# Altium PCB XPIRL_0V0.PCBDOC (part 2 of 4)
Units mil, origin at the board's own origin, x right, y up, seen from the top; angles counter-clockwise.
Board outline 3497.26 x 1372.5 mil, 6 copper layers (Top Layer, Mid-Layer 1, Mid-Layer 2, Mid-Layer 3, Mid-Layer 4, Bottom Layer); 217 components, 126 nets, 782 pads, 361 vias.
Unrouted connection lines stored in the file: 96.
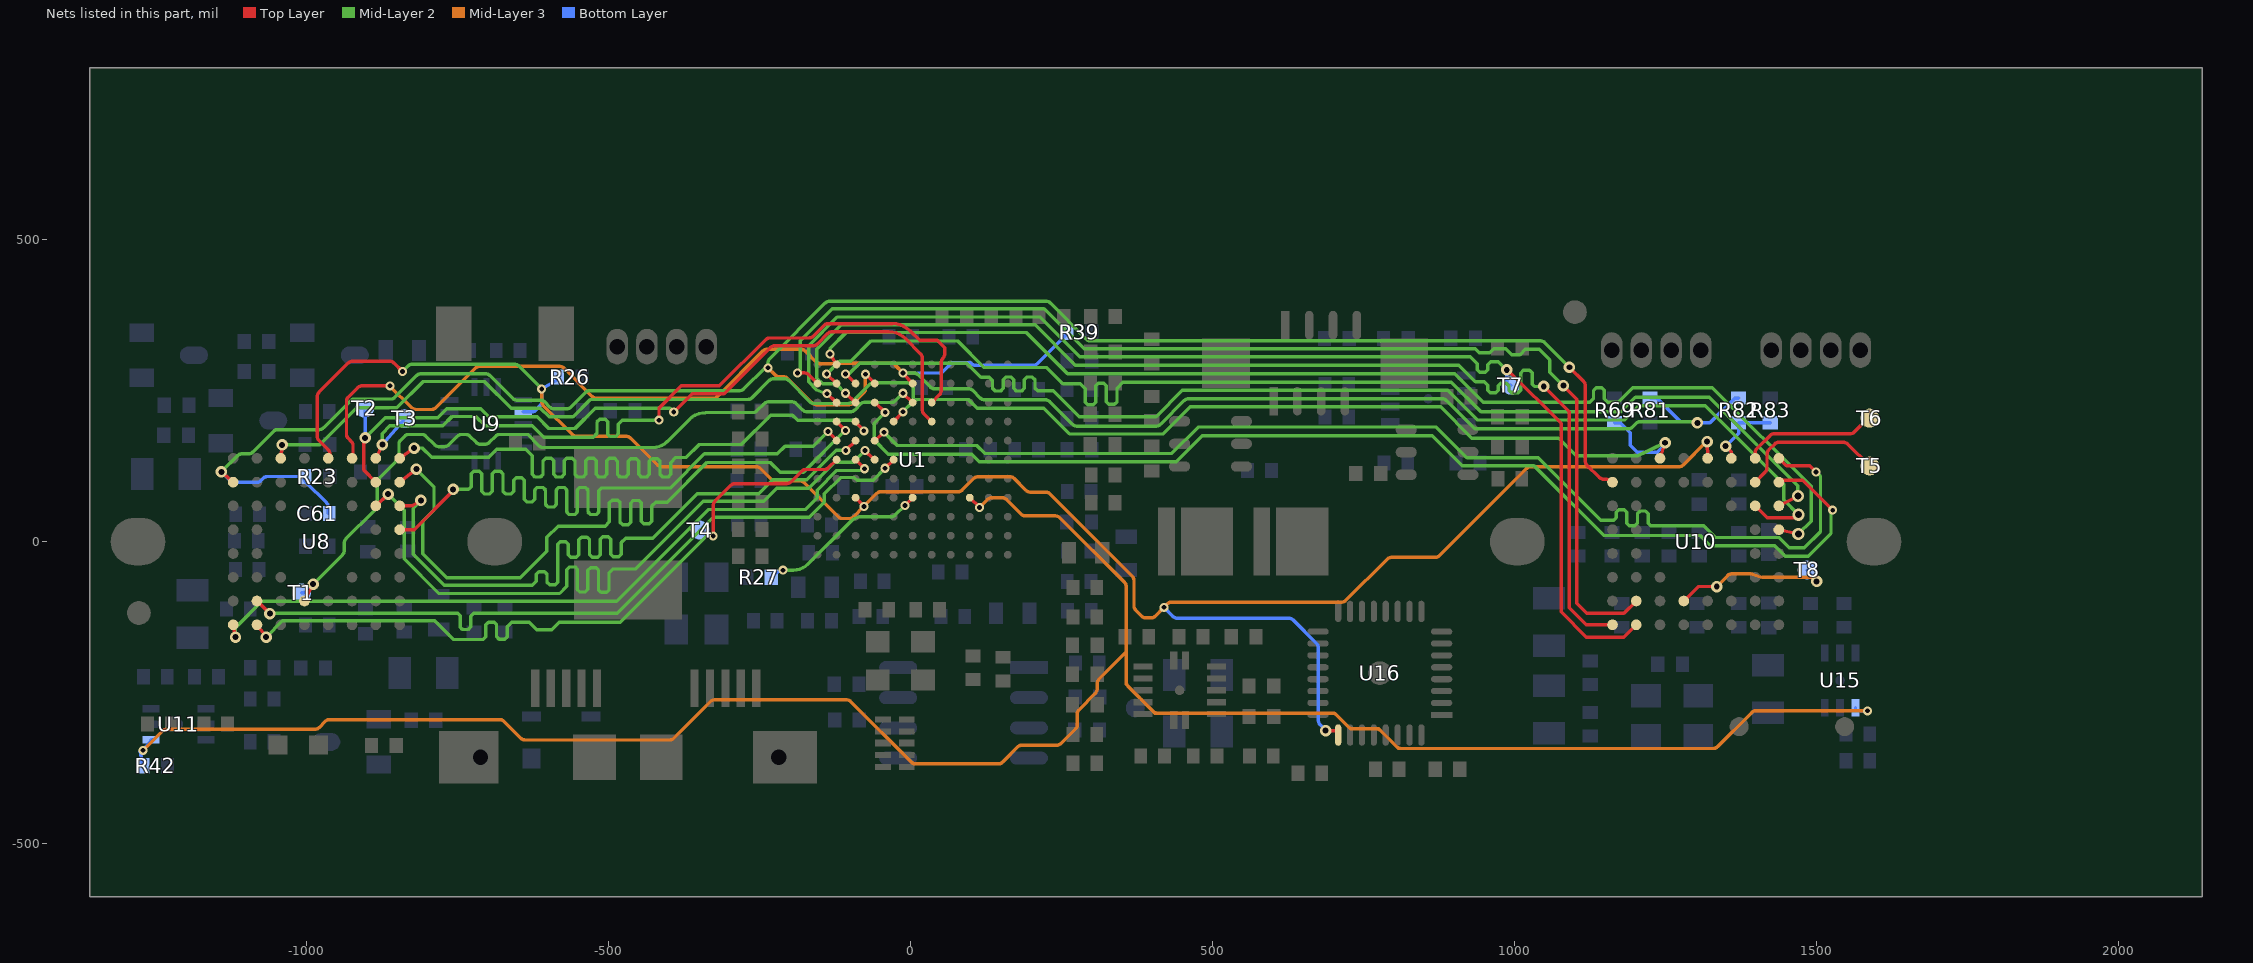
[diagram p6: the nets of this part, all layers, seen from the top]

## Via types
v1: diameter 19, hole 9.84, Top Layer to Bottom Layer, 139 vias
v2: diameter 15, hole 7.87, Top Layer to Bottom Layer, 113 vias
v3: diameter 20.47, hole 11.81, Top Layer to Bottom Layer, 58 vias
v4: diameter 23.62, hole 13.78, Top Layer to Bottom Layer, 42 vias
v5: diameter 0, hole 0, Top Layer to Bottom Layer, 9 vias

## Nets (pads, with @x,y where several pads share a name; then routed paths per layer and width w, separated by ;. In a path a pad name is that pad's centre, name@x,y a point inside that pad or via, vN(x,y) a via of type N, cw(c..) or ccw(c..) an arc to the next point about the centre after c; other vN are vias at no path point) (continued)
CAMPWR_EN: R42.1 U1.D3 U11.4 U15.4 | length 4724.7
  Top Layer w5.6: U1.D3@97.37,72.7 114.15,57.16 v2(113.62,56.6)
  Mid-Layer 3 w5.6: v2(-1271.17,-345.56) -1239.23,-313.62 ; v2(113.62,56.6) 126.58,69.55 cw(c133.51,62.62) 133.51,72.42 151.45,72.42 cw(c151.45,62.62) 158.38,69.55 182.52,45.42 ccw(c189.45,52.35) 189.45,42.55 239.4,42.55 cw(c239.4,32.75) 246.33,39.68 353.58,-67.58 cw(c346.65,-74.51) 356.45,-74.51 356.45,-163.81 356.48,-236.56 403.87,-283.95 701.35,-283.95 727.55,-310.15 770.6,-310.15 ; v2(1583.62,-280.19) 1398.82,-280.19 ; -1239.23,-313.62 cw(c-1232.3,-320.55) -1232.3,-310.75 ; -1239.23,-313.62 cw(c-1232.3,-320.55) -1232.3,-310.75 ; -1232.3,-310.75 -986.64,-310.75 ; -986.64,-310.75 ccw(c-986.64,-300.95) -979.71,-307.88 ; -986.64,-310.75 ccw(c-986.64,-300.95) -979.71,-307.88 ; -979.71,-307.88 -969.44,-297.6 ; -969.44,-297.6 cw(c-962.51,-304.53) -962.51,-294.73 ; -969.44,-297.6 cw(c-962.51,-304.53) -962.51,-294.73 ; -969.44,-297.6 cw(c-962.51,-304.53) -962.51,-294.73 ; -969.44,-297.6 cw(c-962.51,-304.53) -962.51,-294.73 ; -969.44,-297.6 cw(c-962.51,-304.53) -962.51,-294.73 ; -969.44,-297.6 cw(c-962.51,-304.53) -962.51,-294.73 ; -962.51,-294.73 -680.7,-294.73 ; -680.7,-294.73 cw(c-680.7,-304.53) -673.77,-297.6 ; -680.7,-294.73 cw(c-680.7,-304.53) -673.77,-297.6 ; -680.7,-294.73 cw(c-680.7,-304.53) -673.77,-297.6 ; -680.7,-294.73 cw(c-680.7,-304.53) -673.77,-297.6 ; -680.7,-294.73 cw(c-680.7,-304.53) -673.77,-297.6 ; -680.7,-294.73 cw(c-680.7,-304.53) -673.77,-297.6 ; -673.77,-297.6 -645.75,-325.63 ; -645.75,-325.63 ccw(c-638.82,-318.7) -638.82,-328.5 ; -645.75,-325.63 ccw(c-638.82,-318.7) -638.82,-328.5 ; -645.75,-325.63 ccw(c-638.82,-318.7) -638.82,-328.5 ; -645.75,-325.63 ccw(c-638.82,-318.7) -638.82,-328.5 ; -645.75,-325.63 ccw(c-638.82,-318.7) -638.82,-328.5 ; -645.75,-325.63 ccw(c-638.82,-318.7) -638.82,-328.5 ; -638.82,-328.5 -399.55,-328.5 ; -399.55,-328.5 ccw(c-399.55,-318.7) -392.62,-325.63 ; -399.55,-328.5 ccw(c-399.55,-318.7) -392.62,-325.63 ; -399.55,-328.5 ccw(c-399.55,-318.7) -392.62,-325.63 ; -399.55,-328.5 ccw(c-399.55,-318.7) -392.62,-325.63 ; -399.55,-328.5 ccw(c-399.55,-318.7) -392.62,-325.63 ; -399.55,-328.5 ccw(c-399.55,-318.7) -392.62,-325.63 ; -392.62,-325.63 -331.92,-264.93 ; -331.92,-264.93 cw(c-324.99,-271.86) -324.99,-262.06 ; -331.92,-264.93 cw(c-324.99,-271.86) -324.99,-262.06 ; -331.92,-264.93 cw(c-324.99,-271.86) -324.99,-262.06 ; -331.92,-264.93 cw(c-324.99,-271.86) -324.99,-262.06 ; -331.92,-264.93 cw(c-324.99,-271.86) -324.99,-262.06 ; -331.92,-264.93 cw(c-324.99,-271.86) -324.99,-262.06 ; -324.99,-262.06 -106.25,-262.06 ; -106.25,-262.06 cw(c-106.25,-271.86) -99.32,-264.93 ; -106.25,-262.06 cw(c-106.25,-271.86) -99.32,-264.93 ; -106.25,-262.06 cw(c-106.25,-271.86) -99.32,-264.93 ; -106.25,-262.06 cw(c-106.25,-271.86) -99.32,-264.93 ; -106.25,-262.06 cw(c-106.25,-271.86) -99.32,-264.93 ; -106.25,-262.06 cw(c-106.25,-271.86) -99.32,-264.93 ; -99.32,-264.93 0.95,-365.2 ; 0.95,-365.2 ccw(c7.88,-358.27) 7.88,-368.07 ; 0.95,-365.2 ccw(c7.88,-358.27) 7.88,-368.07 ; 7.88,-368.07 144.69,-368.07 ; 144.69,-368.07 ccw(c144.69,-358.27) 151.62,-365.2 ; 144.69,-368.07 ccw(c144.69,-358.27) 151.62,-365.2 ; 151.62,-365.2 176.97,-339.85 ; 176.97,-339.85 cw(c183.9,-346.78) 183.9,-336.98 ; 176.97,-339.85 cw(c183.9,-346.78) 183.9,-336.98 ; 183.9,-336.98 241.7,-336.98 ; 241.7,-336.98 ccw(c241.7,-327.18) 248.63,-334.11 ; 241.7,-336.98 ccw(c241.7,-327.18) 248.63,-334.11 ; 248.63,-334.11 272.68,-310.07 ; 272.68,-310.07 ccw(c265.75,-303.14) 275.55,-303.14 ; 272.68,-310.07 ccw(c265.75,-303.14) 275.55,-303.14 ; 275.55,-303.14 275.55,-285.06 ; 275.55,-285.06 cw(c285.35,-285.06) 278.42,-278.13 ; 275.55,-285.06 cw(c285.35,-285.06) 278.42,-278.13 ; 278.42,-278.13 305.5,-251.05 ; 305.5,-251.05 ccw(c298.57,-244.12) 308.37,-244.12 ; 305.5,-251.05 ccw(c298.57,-244.12) 308.37,-244.12 ; 308.37,-244.12 308.37,-234.91 ; 308.37,-234.91 cw(c318.17,-234.91) 311.24,-227.98 ; 308.37,-234.91 cw(c318.17,-234.91) 311.24,-227.98 ; 311.24,-227.98 356.48,-182.75 356.48,-232.5 ; 356.48,-232.5 ccw(c366.28,-232.5) 359.35,-239.43 ; 356.48,-232.5 ccw(c366.28,-232.5) 359.35,-239.43 ; 359.35,-239.43 401,-281.08 ; 401,-281.08 ccw(c407.93,-274.15) 407.93,-283.95 ; 401,-281.08 ccw(c407.93,-274.15) 407.93,-283.95 ; 407.93,-283.95 697.29,-283.95 ; 697.29,-283.95 cw(c697.29,-293.75) 704.22,-286.82 ; 697.29,-283.95 cw(c697.29,-293.75) 704.22,-286.82 ; 704.22,-286.82 724.68,-307.28 ; 724.68,-307.28 ccw(c731.61,-300.35) 731.61,-310.15 ; 724.68,-307.28 ccw(c731.61,-300.35) 731.61,-310.15 ; 731.61,-310.15 770.6,-310.15 ; 770.6,-310.15 cw(c770.6,-319.95) 777.53,-313.02 ; 770.6,-310.15 cw(c770.6,-319.95) 777.53,-313.02 ; 770.6,-310.15 774.66,-310.15 806.99,-342.48 ; 777.53,-313.02 804.12,-339.61 ; 777.53,-313.02 806.99,-342.48 ; 804.12,-339.61 ccw(c811.05,-332.68) 811.05,-342.48 ; 804.12,-339.61 ccw(c811.05,-332.68) 811.05,-342.48 ; 806.99,-342.48 811.05,-342.48 ; 811.05,-342.48 1328.41,-342.48 ; 1328.41,-342.48 ccw(c1328.41,-332.68) 1335.34,-339.61 ; 1328.41,-342.48 ccw(c1328.41,-332.68) 1335.34,-339.61 ; 1328.41,-342.48 ccw(c1328.41,-332.68) 1335.34,-339.61 ; 1328.41,-342.48 ccw(c1328.41,-332.68) 1335.34,-339.61 ; 1328.41,-342.48 ccw(c1328.41,-332.68) 1335.34,-339.61 ; 1328.41,-342.48 ccw(c1328.41,-332.68) 1335.34,-339.61 ; 1328.41,-342.48 ccw(c1328.41,-332.68) 1335.34,-339.61 ; 1328.41,-342.48 ccw(c1328.41,-332.68) 1335.34,-339.61 ; 1328.41,-342.48 ccw(c1328.41,-332.68) 1335.34,-339.61 ; 1335.34,-339.61 1391.9,-283.06 ; 1391.9,-283.06 cw(c1398.82,-289.99) 1398.82,-280.19 ; 1391.9,-283.06 cw(c1398.82,-289.99) 1398.82,-280.19 ; 1391.9,-283.06 cw(c1398.82,-289.99) 1398.82,-280.19
  Bottom Layer w5.6: R42.1@-1271.78,-371.21 -1275.84,-347.32 -1271.17,-347.32 v2(-1271.17,-345.56) -1256.27,-327.78 U11.4@-1257.87,-327.78 ; U15.4@1563.8,-275 1563.8,-280.19 v2(1583.62,-280.19)
CLK32K768: R27.1 U1.D6 | length 295.9
  Top Layer w5.6: v2(-9.97,59.68) U1.D6@2.88,72.7
  Mid-Layer 2 w5.6: v2(-211.64,-47.3) -194.43,-47.3 ccw(c-194.43,-13.53) -170.55,-37.41 -100.71,32.44 cw(c-79.41,11.14) -79.41,41.26 -32.62,41.26 ccw(c-32.62,51.06) -25.69,44.13 v2(-9.97,59.68)
  Bottom Layer w5.6: R27.1@-231.08,-59.07 -230.29,-64.94 -230.29,-60.86 cw(c-220.49,-60.86) -227.42,-53.93 v2(-211.64,-47.3)
CMOS_D0: T4.1 U1.F10 U8.A7 | length 1277.7
  Top Layer w5.6: U8.A7@-1082.68,-137.8 v1(-1067.39,-158.18) ; v2(-327.31,9.3) -327.31,59.72 ; U1.F10@-123.11,135.69 -136.68,122.12 ; -327.31,59.72 cw(c-317.51,59.72) -324.44,66.65 ; -327.31,59.72 cw(c-317.51,59.72) -324.44,66.65 ; -324.44,66.65 -297.9,93.18 ; -297.9,93.18 cw(c-290.97,86.25) -290.97,96.05 ; -297.9,93.18 cw(c-290.97,86.25) -290.97,96.05 ; -290.97,96.05 -205.42,96.05 ; -205.42,96.05 ccw(c-205.42,105.85) -198.49,98.92 ; -205.42,96.05 ccw(c-205.42,105.85) -198.49,98.92 ; -198.49,98.92 -181.04,116.38 ; -181.04,116.38 cw(c-174.11,109.45) -174.11,119.25 ; -181.04,116.38 cw(c-174.11,109.45) -174.11,119.25 ; -174.11,119.25 -143.61,119.25 ; -143.61,119.25 ccw(c-143.61,129.05) -136.68,122.12 ; -143.61,119.25 ccw(c-143.61,129.05) -136.68,122.12
  Mid-Layer 2 w5.6: v1(-1067.39,-158.18) -1040.43,-131.22 -788.55,-131.22 -757.71,-162.05 -707.85,-162.05 -703.65,-157.85 -703.65,-137.85 -699.32,-133.53 -690.12,-133.53 -686.05,-137.6 -686.05,-157.55 -681.92,-161.68 -672.72,-161.68 -668.45,-157.41 -668.45,-140.88 -661.14,-133.57 -631.62,-133.57 -619.31,-145.89 -594.38,-145.89 -582.06,-133.57 -481.22,-133.57 -338.35,9.3 v2(-327.31,9.3)
  Bottom Layer w5.6: T4.1@-349.06,19.02 -339.53,9.48 -327.49,9.48 v2(-327.31,9.3)
CMOS_D1: U1.F9 U8.A8 | length 1215.7
  Top Layer w5.6: U1.F9@-91.61,135.69 v2(-76.7,120.59)
  Top Layer w6: U8.A8@-1122.05,-137.8 v1(-1118.18,-158.3)
  Mid-Layer 2 w5.6: v1(-1118.18,-158.3) -1118.18,-142.81 -1074.4,-99.02 -487.36,-99.02 -335.29,53.05 -174.62,53.05 -155.34,72.34 -155.34,85.26 -122.86,117.73 -79.55,117.73 v2(-76.7,120.59)
CMOS_D2: U1.F7 U8.B7 | length 1223.7
  Top Layer w5.6: v2(-42.91,121.4) U1.F7@-28.62,135.69
  Top Layer w6: U8.B7@-1082.68,-98.43 -1080.25,-100.32 -1062.79,-117.79 v1(-1061.22,-119.35)
  Mid-Layer 2 w5.6: v1(-1061.22,-119.35) -1060.32,-118.44 -750.55,-118.44 -746.35,-122.64 -746.35,-141.57 -742.4,-145.52 -733.2,-145.52 -728.75,-141.07 -728.75,-123.29 -723.87,-118.4 -485.94,-118.4 -327.17,40.36 -168.58,40.36 -143.48,65.46 -143.48,78.96 -116.41,106.03 -93.54,106.03 -89.2,101.69 -62.62,101.69 v2(-42.91,121.4)
CMOS_D3: U1.G10 U8.E1 | length 1213.8
  Top Layer w5.6: U8.E1@-846.46,19.69 -822.31,19.69 -756.56,85.43 -756.56,86.42 v1(-758,86.42) ; v2(-137.11,182.33) U1.G10@-123.11,167.19
  Mid-Layer 2 w5.6: v1(-758,86.42) -732.38,86.42 -728.18,90.62 -728.18,112.67 -724.1,116.75 -714.9,116.75 -710.58,112.43 -710.58,83.02 -706.38,78.82 -697.18,78.82 -692.98,83.02 -692.98,112.19 -688.67,116.5 -679.47,116.5 -675.38,112.4 -675.38,83.02 -671.18,78.82 -661.98,78.82 -657.78,83.02 -657.78,101.78 -653.76,105.8 -644.56,105.8 -640.18,101.41 -640.18,69.81 -635.98,65.61 -626.78,65.61 -622.58,69.81 -622.58,85.42 -618.38,89.62 -609.18,89.62 -604.98,85.42 -604.98,61.41 -600.78,57.21 -591.58,57.21 -587.38,61.41 -587.38,85.42 -583.18,89.62 -573.98,89.62 -569.78,85.42 -569.78,49.01 -565.58,44.81 -556.38,44.81 -552.18,49.01 -552.18,85.42 -547.98,89.62 -538.78,89.62 -534.58,85.42 -534.58,49.01 -530.38,44.81 -521.18,44.81 -516.98,49.01 -516.98,84.45 -512.78,88.65 -398.6,88.65 -341.83,145.43 -221.01,145.43 -208.45,157.99 -161.46,157.99 v2(-137.11,182.33)
CMOS_D4: U1.G9 U8.F1 | length 1210.8
  Top Layer w5.6: U8.F1@-846.46,59.06 -825.97,59.06 v1(-811.22,68.14) ; v2(-107.74,150.98) U1.G9@-91.61,167.19
  Mid-Layer 2 w5.6: v1(-811.22,68.14) -824.16,55.2 -824.16,-21.19 -772.76,-72.59 -627.06,-72.59 -620.07,-65.59 -620.07,-54.31 -615.78,-50.03 -606.58,-50.03 -602.47,-54.14 -602.47,-67.39 -598.3,-71.57 -589.1,-71.57 -584.87,-67.34 -584.87,-4.51 -580.52,-0.16 -571.32,-0.16 -567.27,-4.22 -567.27,-21.5 -563.07,-25.7 -553.87,-25.7 -549.67,-21.5 -549.67,3.13 -545.37,7.43 -536.17,7.43 -532.07,3.33 -532.07,-21.5 -527.87,-25.7 -518.67,-25.7 -514.47,-21.5 -514.47,3.93 -510.4,8 -501.2,8 -496.87,3.66 -496.87,-21.05 -492.64,-25.28 -483.44,-25.28 -479.27,-21.1 -479.27,-1.5 -472.03,5.74 -427.08,5.74 -353.47,79.34 -251.69,79.34 -228.86,102.17 -172.49,102.17 -123.68,150.98 v2(-107.74,150.98)
CMOS_D5: U1.F8 U8.F2 | length 1211.4
  Top Layer w5.6: v2(-76.04,150.65) -60.6,135.21 U1.F8@-60.11,135.69
  Top Layer w6: U8.F2@-885.83,59.06 v1(-865.49,78.51)
  Mid-Layer 2 w5.5: v1(-865.49,78.51) -838.83,51.85 -838.83,-28.77 -781.65,-85.94 -581.72,-85.94 -569.77,-73.99 -569.77,-46.61 -565.16,-42.01 -555.91,-42.01 -552.27,-45.65 -552.27,-79.4 -548.2,-83.46 -538.95,-83.46 -534.77,-79.27 -534.77,-47.41 -530.44,-43.08 -521.19,-43.08 -517.27,-47 -517.27,-79.67 -513.21,-83.73 -503.96,-83.73 -499.77,-79.54 -499.77,-51.62 -493.65,-45.51 -456.3,-45.51 -344.18,66.61 -243.88,66.61 -222.2,88.29 -169.14,88.29 -126.02,131.41 -95.28,131.41 v2(-76.04,150.65)
CMOS_D6: U1.H10 U8.G1 | length 1215.7
  Top Layer w5.6: U8.G1@-846.46,98.43 v1(-818.75,119.89) ; U1.H10@-123.11,198.68 -108.59,184.17 -108.59,184.87 v2(-108.47,184.03)
  Mid-Layer 2 w5.6: v1(-818.75,119.89) -789.65,90.78 -789.65,52.25 -808.19,33.71 -808.19,-19.86 -768.22,-59.82 -646.58,-59.82 -602.77,-16.01 -602.77,7.13 -584.2,25.69 -506.24,25.69 -499.25,32.69 -499.25,63.99 -494.61,68.62 -485.41,68.62 -481.65,64.86 -481.65,31.83 -477.45,27.63 -468.25,27.63 -464.05,31.83 -464.05,63.66 -459.62,68.09 -450.42,68.09 -446.45,64.11 -446.45,33.75 -442.19,29.5 -432.99,29.5 -428.85,33.64 -428.85,58.91 -422.63,65.13 -403.44,65.13 -337.63,130.94 -232.95,130.94 -216.7,114.69 -177.81,114.69 v2(-108.47,184.03)
CMOS_D7: U1.H9 U8.H1 | length 1218.5
  Top Layer w5.6: U8.H1@-846.46,137.8 v1(-822.45,154.91) ; U1.H9@-91.61,198.68 v2(-77.92,183.34)
  Mid-Layer 2 w5.6: v1(-822.45,154.91) -809.02,154.91 -793.63,139.52 -698.69,139.52 -685.37,152.84 -637.43,152.84 -626.62,142.03 -626.62,111.11 -622.42,106.91 -613.22,106.91 -609.02,111.11 -609.02,133.61 -604.72,137.91 -595.51,137.91 -591.42,133.81 -591.42,111.11 -587.22,106.91 -578.02,106.91 -573.82,111.11 -573.82,133.75 -569.66,137.91 -560.46,137.91 -556.22,133.66 -556.22,111.11 -552.02,106.91 -542.82,106.91 -538.62,111.11 -538.62,133.9 -534.36,138.15 -525.16,138.15 -521.02,134.01 -521.02,111.11 -516.82,106.91 -507.62,106.91 -503.42,111.11 -503.42,133.54 -499.3,137.66 -490.1,137.66 -485.82,133.37 -485.82,111.11 -481.62,106.91 -472.42,106.91 -468.22,111.11 -468.22,133.19 -464,137.41 -454.8,137.41 -450.62,133.22 -450.62,111.11 -446.42,106.91 -437.22,106.91 -433.02,111.11 -433.02,132.84 -428.7,137.16 -419.5,137.16 -415.42,133.08 -415.42,111.11 -411.22,106.91 -402.02,106.91 -397.82,111.11 -397.82,130.57 -389.14,139.25 -371.72,139.25 -350.23,160.74 -280.77,160.74 -232.24,209.27 -196.05,209.27 -187.65,200.87 -95.44,200.87 v2(-77.92,183.34)
CMOS_D8: T7.1 U1.J10 U10.A7 | length 1975.4
  Top Layer w5.6: v2(-139.14,244.94) U1.J10@-123.11,230.18 ; v1(986.43,284.2) 988.13,282.04 989.88,282.04 1076.36,195.55 1076.36,-116.41 1118.12,-158.17 1180.41,-158.17 U10.A7@1200.79,-137.8
  Mid-Layer 2 w5.6: v2(-139.14,244.94) -139.48,244.13 -155.76,250.9 -169.18,264.32 -169.18,324.31 -121.61,371.88 213.6,371.88 279.69,305.79 621.99,305.79 622.03,305.83 925.76,305.83 937.28,294.31 937.28,284.44 941.48,280.24 950.68,280.24 954.88,284.44 954.88,292.57 960.07,297.75 972.42,297.75 986.2,283.97 v1(986.43,284.2)
  Bottom Layer w5.6: v1(986.43,284.2) 986.43,263.04 991.49,257.97 T7.1@993.14,259.01
CMOS_D9: U1.J9 U10.A8 | length 1943.2
  Top Layer w5.6: v2(-108.36,245.61) U1.J9@-91.61,230.18 ; v1(1047.64,256.82) 1089.76,214.7 1089.76,-109.63 1117.93,-137.8 U10.A8@1161.42,-137.8
  Mid-Layer 2 w5.6: v2(-108.36,245.61) -123.92,261.18 -146.25,261.18 -155.76,270.69 -155.76,318.48 -115.53,358.71 205.81,358.71 272.34,292.19 906.8,292.19 934.62,264.36 949.51,264.36 954.86,259.01 954.86,250.55 959.06,246.35 968.26,246.35 972.46,250.55 972.46,257.96 976.66,262.16 985.86,262.16 990.06,257.96 990.06,250.55 994.26,246.35 1005.44,246.35 1009.41,250.32 1009.41,279.06 1014.01,283.66 1024.06,283.66 1028.38,279.34 1028.38,260.73 1032.29,256.82 v1(1047.64,256.82)
CMOS_D10: U1.K11 U10.B7 | length 1941.1
  Top Layer w5.6: v2(-187.76,279.23) -176.22,279.23 cw(c-176.22,269.43) -169.29,276.36 U1.K11@-154.6,261.67 ; v1(1080.03,258.21) 1102.3,235.93 1102.3,-102.42 1118.54,-118.67 1180.55,-118.67 U10.B7@1200.79,-98.43
  Mid-Layer 2 w5.6: v2(-187.76,279.23) -187.97,279.43 -183.32,284.08 -183.32,332.42 -130.38,385.36 220.41,385.36 286.63,319.14 934.58,319.19 941.19,312.57 958.41,312.57 965.02,319.19 984.95,319.19 994.54,309.6 1008.44,309.6 1016.98,318.13 1040.41,318.13 1057.88,300.66 1057.88,280.35 v1(1080.03,258.21)
CMOS_D11: U1.L10 U10.E1 | length 1945.9
  Top Layer w5.5: U10.E1@1437.01,19.69 v3(1469.27,12.62)
  Top Layer w5.6: v2(-133.79,310.6) U1.L10@-123.11,293.17
  Mid-Layer 2 w5.6: v2(-133.79,310.6) -133.79,319.85 -107.49,346.15 191.15,346.15 259.21,278.09 900.57,278.09 947.82,230.84 1123.76,230.84 1130.1,237.19 1130.1,250.2 1134.33,254.43 1143.53,254.43 1147.7,250.26 1147.7,236.52 1153.27,230.95 1171.11,230.95 1194.99,254.83 1326.99,254.83 1490.45,91.37 1490.45,33.8 v3(1469.27,12.62)
CMOS_D12: U1.K10 U10.F1 | length 1944.7
  Top Layer w5.6: v2(-139.53,277.42) -139.75,277.18 U1.K10@-123.11,261.67 ; U10.F1@1437.01,59.06 v3(1468.49,75.43)
  Mid-Layer 2 w5.6: v2(-139.53,277.42) -118.3,298.64 -99.57,298.64 -66.15,332.07 77.29,332.07 121.22,288.14 224.78,288.14 251.72,261.2 280.59,261.2 288.43,253.36 288.43,230.49 292.63,226.29 301.83,226.29 306.03,230.49 306.03,258.15 310.23,262.35 319.43,262.35 323.63,258.15 323.63,231.26 327.83,227.06 337.03,227.06 341.23,231.26 341.23,254.24 351,264 894.75,264 943.78,214.97 1175.21,214.97 1199.5,239.25 1321.37,239.25 1468.49,92.13 v3(1468.49,75.43)
CMOS_D13: U1.K9 U10.F2 | length 1945.6
  Top Layer w5.6: v2(-108.33,277.42) -107.73,278.01 U1.K9@-91.61,261.67 ; U10.F2@1397.64,59.06 1417.31,39.38 1464.12,39.38 v3(1469.4,44.67)
  Mid-Layer 2 w5.6: v2(-108.33,277.42) -102.59,277.42 -84.73,295.27 92.59,295.27 115.96,271.91 129.57,271.91 135.03,266.44 135.03,253.5 139.23,249.3 148.43,249.3 152.63,253.5 152.63,268.22 156.83,272.42 166.03,272.42 170.23,268.22 170.23,253.5 174.43,249.3 183.63,249.3 187.83,253.5 187.83,268.22 192.03,272.42 201.23,272.42 205.43,268.22 205.43,254.09 209.63,249.89 235.58,249.89 278.68,206.79 405.81,206.79 449.49,250.47 888.95,250.47 938.18,201.24 1181.2,201.24 1204.83,224.87 1314.8,224.87 1444.73,94.94 1444.73,69.35 v3(1469.4,44.67)
CMOS_D14: U1.J8 U10.G1 | length 1943.4
  Top Layer w5.6: U1.J8@-60.11,230.18 v2(-42.67,214.03) ; U10.G1@1437.01,98.43 1439.52,101.69 1476.29,101.69 v2(1526.04,51.94)
  Mid-Layer 2 w5.6: v2(-42.67,214.03) -61,195.7 -61,168.19 -37.57,144.76 101.03,144.76 113.4,132.39 439.62,132.39 482.5,175.27 863.37,175.27 913,125.64 1031.52,125.64 1147.04,10.12 1306.33,10.12 1323.28,-6.83 1430.02,-6.83 1447.71,-24.53 1485.32,-24.53 1523.16,13.32 1523.16,49.07 v2(1526.04,51.94)
CMOS_D15: U1.G8 U10.H1 | length 1939.9
  Top Layer w5.6: U1.G8@-60.11,167.19 v2(-44.56,181.17) ; U10.H1@1437.01,137.8 1449.49,125.31 1488.41,125.31 v2(1498.4,115.32)
  Mid-Layer 2 w5.6: v2(-44.56,181.17) -22.43,159.04 109.35,159.04 122.48,145.91 431.75,145.91 475.48,189.65 869.78,189.65 920.56,138.87 1038.39,138.87 1141.68,35.58 1163.4,35.58 1167.6,39.78 1167.6,48.51 1171.8,52.71 1181,52.71 1185.2,48.51 1185.2,30.12 1189.4,25.92 1198.6,25.92 1202.8,30.12 1202.8,46.35 1207,50.55 1216.2,50.55 1220.4,46.34 1220.4,30.12 1224.6,25.92 1312.38,25.92 1331.47,6.84 1436.83,6.84 1453.88,-10.21 1478.99,-10.21 1505.91,16.7 1505.91,107.81 v2(1498.4,115.32)
CMOS_HD: T3.1 U1.J5 U8.H2 | length 1393.6
  Top Layer w5.6: U8.H2@-885.83,137.8 v1(-875.13,160.6) ; v2(-417.04,201) -417.04,220.71 -379.98,257.77 -316.99,257.77 -240.55,334.21 ; U1.J5@34.37,230.18 47.25,243.06 ; -240.55,334.21 cw(c-233.62,327.28) -233.62,337.08 ; -240.55,334.21 cw(c-233.62,327.28) -233.62,337.08 ; -233.62,337.08 -168.79,337.08 ; -168.79,337.08 ccw(c-168.79,346.88) -161.86,339.95 ; -168.79,337.08 ccw(c-168.79,346.88) -161.86,339.95 ; -161.86,339.95 -143.73,358.08 ; -143.73,358.08 cw(c-136.8,351.15) -136.8,360.95 ; -143.73,358.08 cw(c-136.8,351.15) -136.8,360.95 ; -136.8,360.95 -30.76,360.95 ; -30.76,360.95 cw(c-30.76,319.61) -1.53,348.84 ; -30.76,360.95 cw(c-30.76,319.61) -1.53,348.84 ; -1.53,348.84 14.28,333.03 43.5,333.03 55.92,320.61 55.92,310.44 ; 47.25,243.06 ccw(c40.32,249.99) 50.12,249.99 ; 47.25,243.06 ccw(c40.32,249.99) 50.12,249.99 ; 50.12,249.99 50.12,296.52 ; 50.12,296.52 cw(c59.92,296.52) 52.99,303.45 ; 50.12,296.52 cw(c59.92,296.52) 52.99,303.45 ; 52.99,303.45 53.05,303.51 ; 53.05,303.51 ccw(c46.12,310.44) 55.92,310.44 ; 53.05,303.51 ccw(c46.12,310.44) 55.92,310.44
  Mid-Layer 2 w5.6: v1(-875.13,160.6) -875.13,178.9 -862.56,191.47 -775.37,191.47 -759.78,207.06 -720.31,207.06 -704.88,191.63 -626.86,191.63 -607.98,172.74 -525.9,172.74 -519.71,178.93 -519.71,198.05 -515.41,202.35 -506.21,202.35 -502.11,198.24 -502.11,177.79 -498.22,173.9 -489.02,173.9 -484.51,178.41 -484.51,194.46 -477.98,201 v2(-417.04,201)
  Bottom Layer w5.6: v1(-875.13,160.6) T3.1@-837.71,203.79
CMOS_HD_R: T6.1 U10.H2 | length 223.6
  Top Layer w5.6: U10.H2@1397.64,137.8 1397.64,146.94 cw(c1407.44,146.94) 1400.51,153.87 1422.31,175.66 cw(c1429.24,168.73) 1429.24,178.53 1554.83,178.53 ccw(c1554.83,188.33) 1561.76,181.4 1584.8,204.45 T6.1@1587.13,204.45
CMOS_OE: R69.2 U1.H7 U8.H6 U10.H6 | length 2772.3
  Top Layer w5.6: U1.H7@-28.62,198.68 v2(-13.18,214.84) ; U10.H6@1240.16,137.8 v1(1248.54,163.66)
  Top Layer w6: U8.H6@-1043.31,137.8 v1(-1040.87,160.1)
  Mid-Layer 2 w5.6: v1(-1040.87,160.1) -978.52,160.1 -917.29,221.33 -850.85,221.33 -807.16,265.03 -706.04,265.03 -661.89,220.88 -613.57,220.88 -599.1,206.41 -559.36,206.41 -530.54,235.23 -270.02,235.23 ccw(c-270.02,245.03) -263.09,238.1 -234.4,266.8 cw(c-227.47,259.87) -227.47,269.67 -209.45,269.67 cw(c-209.45,259.87) -202.52,266.8 -167.3,231.57 ccw(c-160.37,238.5) -160.37,228.7 -103.93,228.7 ccw(c-103.93,238.5) -97,231.57 -68.71,259.87 cw(c-61.78,252.94) -61.78,262.74 -27.58,262.74 -27.52,262.8 -6.51,262.8 cw(c-6.51,253) 0.42,259.93 1.16,259.19 cw(c-5.77,252.26) 4.03,252.26 4.03,232.05 v2(-13.18,214.84) 4.34,232.36 ; v1(1248.54,163.66) 1203.19,142.14 1101.8,142.14 1072.58,171.36 928.51,171.36 876.92,222.96 462.33,222.96 417.54,178.17 262.45,178.17 220.16,220.45 109.97,220.45 95.19,235.23 11.27,235.23 ; 4.34,232.36 cw(c11.27,225.43) 11.27,235.23 ; 4.34,232.36 cw(c11.27,225.43) 11.27,235.23
  Bottom Layer w5.6: R69.2@1164.93,196.86 1174.66,196.86 1191,180.53 1191,159.22 1202.31,147.92 1235.6,147.92 1248.54,160.86 v1(1248.54,163.66)
CMOS_PCLK: T1.1 U1.J6 U8.B5 | length 1546
  Top Layer w5.6: U8.B5@-1003.94,-98.43 v1(-989.76,-70.35) ; v2(-13.14,245.57) U1.J6@2.88,230.18
  Mid-Layer 2 w5.5: v1(-989.76,-70.35) -941,-21.58 ; -427.33,155.72 -608.95,155.72 ; v2(-13.14,245.57) -25.63,233.13 ; -941,-21.58 ccw(c-947.8,-14.78) -938.18,-14.78 ; -941,-21.58 ccw(c-947.8,-14.78) -938.18,-14.78 ; -938.18,-14.78 -938.18,-2.43 ; -938.18,-2.43 cw(c-928.55,-2.43) -935.36,4.37 ; -938.18,-2.43 cw(c-928.55,-2.43) -935.36,4.37 ; -935.36,4.37 -889.43,50.31 ; -889.43,50.31 ccw(c-903.33,64.21) -883.67,64.21 ; -889.43,50.31 ccw(c-903.33,64.21) -883.67,64.21 ; -883.67,64.21 -883.67,91.63 ; -883.67,91.63 cw(c-859.77,91.63) -876.67,108.53 ; -883.67,91.63 cw(c-859.77,91.63) -876.67,108.53 ; -876.67,108.53 -853.64,131.56 ; -853.64,131.56 ccw(c-868.16,146.08) -847.63,146.08 ; -853.64,131.56 ccw(c-868.16,146.08) -847.63,146.08 ; -847.63,146.08 -847.63,161.3 ; -847.63,161.3 cw(c-838,161.3) -844.81,168.11 ; -847.63,161.3 cw(c-838,161.3) -844.81,168.11 ; -844.81,168.11 -838.37,174.54 ; -838.37,174.54 cw(c-831.57,167.74) -831.57,177.36 ; -838.37,174.54 cw(c-831.57,167.74) -831.57,177.36 ; -831.57,177.36 -809.67,177.36 ; -809.67,177.36 cw(c-809.67,167.74) -802.86,174.54 ; -809.67,177.36 cw(c-809.67,167.74) -802.86,174.54 ; -802.86,174.54 -788.3,159.98 ; -788.3,159.98 ccw(c-781.49,166.78) -781.49,157.16 ; -788.3,159.98 ccw(c-781.49,166.78) -781.49,157.16 ; -781.49,157.16 -772.1,157.16 ; -772.1,157.16 ccw(c-772.1,166.78) -765.3,159.98 ; -772.1,157.16 ccw(c-772.1,166.78) -765.3,159.98 ; -765.3,159.98 -750.73,174.54 ; -750.73,174.54 cw(c-743.92,167.74) -743.93,177.36 ; -750.73,174.54 cw(c-743.92,167.74) -743.93,177.36 ; -743.92,177.36 -737.1,177.36 ; -737.1,177.36 cw(c-737.1,167.74) -730.29,174.54 ; -737.1,177.36 cw(c-737.1,167.74) -730.29,174.54 ; -730.29,174.54 -719.83,164.08 ; -719.83,164.08 ccw(c-713.02,170.88) -713.02,161.26 ; -719.83,164.08 ccw(c-713.02,170.88) -713.02,161.26 ; -713.02,161.26 -704.84,161.26 ; -704.84,161.26 ccw(c-704.84,170.88) -698.03,164.08 ; -704.84,161.26 ccw(c-704.84,170.88) -698.03,164.08 ; -698.03,164.08 -687.57,174.54 ; -687.57,174.54 cw(c-680.76,167.74) -680.76,177.36 ; -687.57,174.54 cw(c-680.76,167.74) -680.76,177.36 ; -680.76,177.36 -634.58,177.36 -615.75,158.54 ; -615.75,158.54 ccw(c-608.95,165.34) -608.95,155.72 ; -615.75,158.54 ccw(c-608.95,165.34) -608.95,155.72 ; -403.26,165.66 cw(c-427.31,189.71) -427.31,155.7 ccw(c-427.31,189.71) -403.26,165.66 ; -403.26,165.66 -366.54,202.38 ; -366.54,202.38 cw(c-340.11,175.95) -340.11,213.33 ; -366.54,202.38 cw(c-340.11,175.95) -340.11,213.33 ; -340.11,213.33 -261.67,213.57 ; -261.67,213.57 ccw(c-261.67,223.19) -254.86,216.39 ; -261.67,213.57 ccw(c-261.67,223.19) -254.86,216.39 ; -254.86,216.39 -242.8,228.45 ; -242.8,228.45 cw(c-236,221.64) -236,231.27 ; -242.8,228.45 cw(c-236,221.64) -236,231.27 ; -236,231.27 -196.58,231.27 ; -196.58,231.27 cw(c-196.58,221.64) -189.77,228.45 ; -196.58,231.27 cw(c-196.58,221.64) -189.77,228.45 ; -189.77,228.45 -179.12,217.8 ; -179.12,217.8 ccw(c-172.31,224.6) -172.31,214.98 ; -179.12,217.8 ccw(c-172.31,224.6) -172.31,214.98 ; -172.31,214.98 -100.09,214.98 ; -100.09,214.98 ccw(c-100.09,224.6) -93.28,217.8 ; -100.09,214.98 ccw(c-100.09,224.6) -93.28,217.8 ; -93.28,217.8 -83.03,228.05 ; -83.03,228.05 cw(c-76.23,221.24) -76.23,230.87 ; -83.03,228.05 cw(c-76.23,221.24) -76.23,230.87 ; -76.23,230.87 -56.28,230.87 -55.73,230.32 -32.44,230.32 ; -32.44,230.32 ccw(c-32.44,239.94) -25.63,233.13 ; -32.44,230.32 ccw(c-32.44,239.94) -25.63,233.13
  Bottom Layer w5.6: T1.1@-1008.93,-84.89 -1008.36,-84.89 ccw(c-1008.36,-75.09) -1001.43,-82.02 v1(-989.76,-70.35)
CMOS_PCLK_R: T8.1 U10.B5 | length 266.3
  Top Layer w5.6: U10.B5@1279.53,-98.43 1303.52,-74.43 v1(1334.07,-74.43)
  Mid-Layer 3 w5.6: v1(1334.07,-74.43) 1352.24,-56.26 cw(c1359.17,-63.19) 1359.17,-53.39 1390.16,-53.39 1408.99,-59.25 1492.67,-59.25 v1(1499.32,-65.89)
  Bottom Layer w5.6: T8.1@1483.52,-46.98 v1(1499.32,-65.89)
CMOS_RST: C61.2 R23.1 U1.K8 U8.G8 U10.G8 | length 3411.7
  Top Layer w5.6: v2(-75.37,276.99) -75.39,278.35 U1.K8@-60.11,261.67 ; v1(1090.07,288.65) 1113.49,265.23 ; U10.G8@1161.42,98.43 U10.G8@1157.55,100.43 ; 1113.49,265.23 cw(c1106.56,258.31) 1116.36,258.31 ; 1113.49,265.23 cw(c1106.56,258.31) 1116.36,258.31 ; 1113.49,265.23 cw(c1106.56,258.31) 1116.36,258.31 ; 1116.36,133.61 ccw(c1126.16,133.61) 1119.23,126.68 ; 1116.36,133.61 ccw(c1126.16,133.61) 1119.23,126.68 ; 1116.36,133.61 ccw(c1126.16,133.61) 1119.23,126.68 ; 1116.36,133.61 1116.36,258.31 ; 1119.23,126.68 1139.75,106.17 ; 1139.75,106.17 ccw(c1146.68,113.1) 1146.68,103.3 ; 1139.75,106.17 ccw(c1146.68,113.1) 1146.68,103.3 ; 1139.75,106.17 ccw(c1146.68,113.1) 1146.68,103.3 ; 1146.68,103.3 1150.62,103.3 ; 1150.62,103.3 cw(c1150.62,93.5) U10.G8@1157.55,100.43 ; 1150.62,103.3 cw(c1150.62,93.5) U10.G8@1157.55,100.43 ; 1150.62,103.3 cw(c1150.62,93.5) U10.G8@1157.55,100.43
  Top Layer w6: v1(-1141.61,115.28) U8.G8@-1122.05,98.43
  Mid-Layer 2 w5.5: -623.97,234.24 -613.25,234.24 ; v2@-237.57,287.67 -241.55,287.67 -276.45,252.78 ; -613.25,234.24 cw(c-613.25,224.62) -606.45,231.42 ; -613.25,234.24 cw(c-613.25,224.62) -606.45,231.42 ; -606.45,231.42 -597.58,222.55 ; -597.58,222.55 ccw(c-590.77,229.36) -590.77,219.73 ; -597.58,222.55 ccw(c-590.77,229.36) -590.77,219.73 ; -590.77,219.73 -569.88,219.73 ; -569.88,219.73 ccw(c-569.88,229.36) -563.08,222.55 ; -569.88,219.73 ccw(c-569.88,229.36) -563.08,222.55 ; -563.08,222.55 -538.49,247.14 ; -538.49,247.14 cw(c-531.68,240.34) -531.68,249.96 ; -538.49,247.14 cw(c-531.68,240.34) -531.68,249.96 ; -531.68,249.96 -283.25,249.96 ; -283.25,249.96 ccw(c-283.25,259.59) -276.45,252.78 ; -283.25,249.96 ccw(c-283.25,259.59) -276.45,252.78
  Mid-Layer 2 w5.6: v1(-1141.61,115.28) -1114.39,142.51 ; -623.97,234.24 -652.39,234.24 ; v2@-237.57,287.67 v2(-236.76,287.67) -236.76,295.66 ; v1(1090.07,288.65) 1049.36,329.36 ; -1114.39,142.51 cw(c-1107.46,135.58) -1107.46,145.38 ; -1114.39,142.51 cw(c-1107.46,135.58) -1107.46,145.38 ; -1107.46,145.38 -1096.43,145.38 ; -1096.43,145.38 ccw(c-1096.43,155.18) -1089.5,148.25 ; -1096.43,145.38 ccw(c-1096.43,155.18) -1089.5,148.25 ; -1089.5,148.25 -1055.16,182.58 ; -1055.16,182.58 cw(c-1048.23,175.65) -1048.23,185.45 ; -1055.16,182.58 cw(c-1048.23,175.65) -1048.23,185.45 ; -1048.23,185.45 -979.38,185.45 ; -979.38,185.45 ccw(c-979.38,195.25) -972.45,188.32 ; -979.38,185.45 ccw(c-979.38,195.25) -972.45,188.32 ; -972.45,188.32 -927.66,233.11 ; -927.66,233.11 cw(c-920.73,226.18) -920.73,235.98 ; -927.66,233.11 cw(c-920.73,226.18) -920.73,235.98 ; -920.73,235.98 -861.1,235.98 ; -861.1,235.98 ccw(c-861.1,245.78) -854.17,238.85 ; -861.1,235.98 ccw(c-861.1,245.78) -854.17,238.85 ; -854.17,238.85 -817.91,275.12 ; -817.91,275.12 cw(c-810.98,268.19) -810.98,277.99 ; -817.91,275.12 cw(c-810.98,268.19) -810.98,277.99 ; -810.98,277.99 -704.25,277.99 ; -704.25,277.99 cw(c-704.25,268.19) -697.32,275.12 ; -704.25,277.99 cw(c-704.25,268.19) -697.32,275.12 ; -697.32,275.12 -659.32,237.11 ; -659.32,237.11 ccw(c-652.39,244.04) -652.39,234.24 ; -659.32,237.11 ccw(c-652.39,244.04) -652.39,234.24 ; -236.76,295.66 cw(c-226.96,295.66) -233.89,302.59 ; -236.76,295.66 cw(c-226.96,295.66) -233.89,302.59 ; -236.76,295.66 cw(c-226.96,295.66) -233.89,302.59 ; -233.89,302.59 -141.45,395.04 ; -141.45,395.04 cw(c-134.52,388.11) -134.52,397.91 ; -141.45,395.04 cw(c-134.52,388.11) -134.52,397.91 ; -141.45,395.04 cw(c-134.52,388.11) -134.52,397.91 ; -134.52,397.91 223.76,397.91 ; 223.76,397.91 cw(c223.76,388.11) 230.69,395.04 ; 223.76,397.91 cw(c223.76,388.11) 230.69,395.04 ; 223.76,397.91 cw(c223.76,388.11) 230.69,395.04 ; 230.69,395.04 290.63,335.1 ; 290.63,335.1 ccw(c297.55,342.03) 297.55,332.23 ; 290.63,335.1 ccw(c297.55,342.03) 297.55,332.23 ; 290.63,335.1 ccw(c297.55,342.03) 297.55,332.23 ; 297.55,332.23 1042.43,332.23 ; 1042.43,332.23 cw(c1042.43,322.43) 1049.36,329.36 ; 1042.43,332.23 cw(c1042.43,322.43) 1049.36,329.36 ; 1042.43,332.23 cw(c1042.43,322.43) 1049.36,329.36
  Mid-Layer 3 w5.6: v2(-236.76,287.67) -225.01,275.92 ccw(c-218.08,282.85) -218.08,273.05 -211.34,273.05 cw(c-211.34,263.25) -204.41,270.17 -163.91,229.67 ccw(c-156.98,236.6) -156.98,226.8 -101.59,226.8 ccw(c-101.59,236.6) -94.66,229.67 -78.24,246.1 ccw(c-85.17,253.03) -75.37,253.03 v2(-75.37,276.99)
  Bottom Layer w5.5: R23.1@-1004.59,105.3 R23.1@-1003.12,107.66
  Bottom Layer w5.6: v1(-1141.61,115.28) -1127.22,100.89 ccw(c-1120.29,107.82) -1120.29,98.02 -1083.13,98.02 ccw(c-1083.13,107.82) -1076.2,100.89 -1072.3,104.79 cw(c-1065.37,97.86) -1065.37,107.66 R23.1@-1003.12,107.66 ; R23.1@-1004.59,105.3 ccw(c-994.79,105.3) -1001.72,98.37 -967.49,64.14 cw(c-974.42,57.21) -964.62,57.21 -964.62,46.51 C61.2@-962.96,46.33
CMOS_VD: T2.1 U1.H5 U8.G2 | length 1356.7
  Top Layer w5.6: v1(-903.61,171.71) -905.89,160.77 -905.89,152.15 -905.89,118.49 U8.G2@-885.83,98.43 ; v2(-392.61,214.41) -362.35,244.67 -309.4,244.67 -232.85,321.22 ; U1.H5@34.37,198.68 21.48,211.57 ; -232.85,321.22 cw(c-225.92,314.29) -225.92,324.09 ; -232.85,321.22 cw(c-225.92,314.29) -225.92,324.09 ; -225.92,324.09 -162.16,324.09 ; -162.16,324.09 ccw(c-162.16,333.89) -155.23,326.96 ; -162.16,324.09 ccw(c-162.16,333.89) -155.23,326.96 ; -155.23,326.96 -137.63,344.57 ; -137.63,344.57 cw(c-130.7,337.64) -130.7,347.44 ; -137.63,344.57 cw(c-130.7,337.64) -130.7,347.44 ; -130.7,347.44 -36.92,347.44 ; -36.92,347.44 cw(c-36.92,307.49) -8.67,335.74 ; -36.92,347.44 cw(c-36.92,307.49) -8.67,335.74 ; -8.67,335.74 15.74,311.33 ; 15.74,311.33 cw(c8.81,304.4) 18.61,304.4 ; 15.74,311.33 cw(c8.81,304.4) 18.61,304.4 ; 18.61,218.5 ccw(c28.41,218.5) 21.48,211.57 ; 18.61,218.5 ccw(c28.41,218.5) 21.48,211.57 ; 18.61,218.5 18.61,304.4
  Mid-Layer 2 w5.6: v1(-903.61,171.71) -870.37,204.94 -783.33,204.94 -768.66,219.61 -712.06,219.61 -698.93,206.48 -618.55,206.48 -599.3,187.22 -556.13,187.22 -522.69,220.66 -398.86,220.66 v2(-392.61,214.41)
  Bottom Layer w5.6: T2.1@-904.49,220.76 -903.61,219.87 v1(-903.61,171.71)
CMOS_VD_R: T5.1 U10.G2 | length 249.4
  Top Layer w5.6: U10.G2@1397.64,98.43 1414.39,115.17 ccw(c1407.46,122.1) 1417.26,122.1 1417.26,144.78 cw(c1427.06,144.78) 1420.13,151.71 1429.92,161.5 cw(c1436.85,154.57) 1436.85,164.37 1543.93,164.37 cw(c1543.93,154.57) 1550.86,161.5 T5.1@1587.13,125.22
EXPOSURE: R39.1 R81.2 R82.1 U1.K6 U8.H3 | length 3141.5
  Top Layer w5.6: U8.H3@-925.2,137.8 -923.56,136.91 -923.56,158.77 ccw(c-933.36,158.77) -926.43,165.7 -931.6,170.87 cw(c-924.67,177.8) -934.47,177.8 -934.47,232.23 cw(c-924.67,232.23) -931.6,239.16 -915.81,254.95 cw(c-908.88,248.02) -908.88,257.82 v2(-862.44,257.82) ; v2(-13.03,279.04) -13.07,279 U1.K6@2.88,261.67
  Mid-Layer 2 w5.6: v2(-13.03,279.04) 4.85,279.04 ; v1(1302.05,196.51) 1302.05,198.61 1207.71,198.61 ; 4.85,279.04 cw(c4.85,269.24) 11.78,276.17 ; 4.85,279.04 cw(c4.85,269.24) 11.78,276.17 ; 11.78,276.17 31.89,256.05 ; 31.89,256.05 ccw(c38.82,262.98) 38.82,253.18 ; 31.89,256.05 ccw(c38.82,262.98) 38.82,253.18 ; 38.82,253.18 95.14,253.18 ; 95.14,253.18 cw(c95.14,243.38) 102.07,250.31 ; 95.14,253.18 cw(c95.14,243.38) 102.07,250.31 ; 102.07,250.31 114.82,237.56 ; 114.82,237.56 ccw(c121.75,244.49) 121.75,234.69 ; 114.82,237.56 ccw(c121.75,244.49) 121.75,234.69 ; 121.75,234.69 222.75,234.69 ; 222.75,234.69 cw(c222.75,224.89) 229.68,231.82 ; 222.75,234.69 cw(c222.75,224.89) 229.68,231.82 ; 229.68,231.82 267.46,194.04 ; 267.46,194.04 ccw(c274.39,200.97) 274.39,191.17 ; 267.46,194.04 ccw(c274.39,200.97) 274.39,191.17 ; 274.39,191.17 406.31,191.17 ; 406.31,191.17 ccw(c406.31,200.97) 413.24,194.04 ; 406.31,191.17 ccw(c406.31,200.97) 413.24,194.04 ; 413.24,194.04 452.88,233.68 ; 452.88,233.68 cw(c459.81,226.76) 459.81,236.56 ; 452.88,233.68 cw(c459.81,226.76) 459.81,236.56 ; 459.81,236.56 879.48,236.56 ; 879.48,236.56 cw(c879.48,226.76) 886.41,233.68 ; 879.48,236.56 cw(c879.48,226.76) 886.41,233.68 ; 886.41,233.68 930.62,189.47 ; 930.62,189.47 ccw(c937.55,196.4) 937.55,186.6 ; 930.62,189.47 ccw(c937.55,196.4) 937.55,186.6 ; 937.55,186.6 1187.58,186.6 ; 1187.58,186.6 ccw(c1187.58,196.4) 1194.51,189.47 ; 1187.58,186.6 ccw(c1187.58,196.4) 1194.51,189.47 ; 1194.51,189.47 1200.78,195.74 ; 1200.78,195.74 cw(c1207.71,188.81) 1207.71,198.61 ; 1200.78,195.74 cw(c1207.71,188.81) 1207.71,198.61
  Mid-Layer 3 w5.6: v2(-862.44,257.82) -862.44,257.52 -826.47,221.56 ccw(c-819.54,228.49) -819.54,218.69 -793.63,218.69 ccw(c-793.63,228.49) -786.7,221.56 -721.14,287.12 cw(c-714.21,280.19) -714.21,289.99 -581.13,289.99 cw(c-581.13,280.19) -574.2,287.12 -527.24,240.16 ccw(c-520.31,247.09) -520.31,237.29 -327.25,237.29 ccw(c-327.25,247.09) -320.32,240.16 -244.97,315.51 cw(c-238.04,308.58) -238.04,318.38 -181.86,318.38 cw(c-181.86,308.58) -174.93,315.51 -156.65,297.23 ccw(c-149.72,304.16) -149.72,294.36 -122.69,294.36 -121.83,295.21 -33.26,295.21 cw(c-33.26,285.41) -26.33,292.34 v2(-13.03,279.04)
  Bottom Layer w5.6: v2(-13.03,279.04) 46.3,279.04 ccw(c46.3,288.84) 53.23,281.91 64.8,293.48 cw(c71.73,286.55) 71.73,296.35 98.71,296.35 100.49,294.57 ccw(c107.42,301.5) 107.42,291.7 202.22,291.7 ccw(c202.22,301.5) 209.15,294.57 257.34,342.76 257.34,345.62 R39.1@258.32,346.6 ; R81.2@1223.66,237.81 1234.34,237.81 1273.35,198.8 1299.76,198.8 v1(1302.05,196.51) 1322.92,196.51 1363.53,237.12 1369.63,237.12 R82.1@1370.31,237.81
EXPOSURE': R82.2 R83.1 U10.H3 | length 124.5
  Top Layer w5.6: v1(1348.89,158.12) 1358.27,148.74 U10.H3@1358.27,137.8
  Bottom Layer w5.6: v1(1348.89,158.12) 1370.31,179.54 R82.2@1370.31,196.86 1420.69,196.86 1420.96,196.59 R83.1@1422.82,196.86
FX3_SCL: R26.2 U1.D9 U8.H4 U9.2 U10.H4 U16.25 | length 3984.6
  Top Layer w5.6: U8.H4@-964.57,137.8 -962.03,145.34 ccw(c-971.83,145.34) -964.9,152.27 -980.05,167.42 cw(c-973.12,174.35) -982.92,174.35 -982.92,239.94 cw(c-973.12,239.94) -980.05,246.87 -931.14,295.78 cw(c-924.21,288.85) -924.21,298.65 -862.83,298.65 cw(c-862.83,288.85) -855.9,295.78 v2(-841.71,281.59) ; U1.D9@-91.61,72.7 v2(-77.73,58.3) ; v1(686.65,-313.08) 707.35,-313.08 U16.25@707.35,-320.3 ; v1(1318.17,165.35) U10.H4@1318.9,137.8
  Mid-Layer 2 w5.6: v2(-841.71,281.59) -832.43,290.87 cw(c-825.5,283.94) -825.5,293.74 -656.39,293.74 cw(c-656.39,283.94) -649.46,290.87 v2(-611.33,252.74)
  Mid-Layer 3 w5.6: v2(-611.33,252.74) -611.33,231.84 ; v1(1318.17,165.35) 1316.7,164.9 1278.59,126.8 ; -611.33,231.84 ccw(c-601.53,231.84) -608.45,224.91 ; -611.33,231.84 ccw(c-601.53,231.84) -608.45,224.91 ; -611.33,231.84 ccw(c-601.53,231.84) -608.45,224.91 ; -608.45,224.91 -560.9,177.35 ; -560.9,177.35 ccw(c-553.97,184.28) -553.97,174.48 ; -560.9,177.35 ccw(c-553.97,184.28) -553.97,174.48 ; -560.9,177.35 ccw(c-553.97,184.28) -553.97,174.48 ; -553.97,174.48 -471.63,174.48 ; -471.63,174.48 cw(c-471.63,164.68) -464.7,171.61 ; -471.63,174.48 cw(c-471.63,164.68) -464.7,171.61 ; -471.63,174.48 cw(c-471.63,164.68) -464.7,171.61 ; -464.7,171.61 -420,126.92 ; -420,126.92 ccw(c-413.07,133.85) -413.07,124.05 ; -420,126.92 ccw(c-413.07,133.85) -413.07,124.05 ; -420,126.92 ccw(c-413.07,133.85) -413.07,124.05 ; -413.07,124.05 -256.24,124.05 ; -256.24,124.05 cw(c-256.24,114.25) -249.31,121.18 ; -256.24,124.05 cw(c-256.24,114.25) -249.31,121.18 ; -256.24,124.05 cw(c-256.24,114.25) -249.31,121.18 ; -249.31,121.18 -231.58,103.45 ; -231.58,103.45 ccw(c-224.65,110.38) -224.65,100.58 ; -231.58,103.45 ccw(c-224.65,110.38) -224.65,100.58 ; -231.58,103.45 ccw(c-224.65,110.38) -224.65,100.58 ; -224.65,100.58 -183.77,100.58 ; -183.77,100.58 cw(c-183.77,90.78) -176.84,97.71 ; -183.77,100.58 cw(c-183.77,90.78) -176.84,97.71 ; -183.77,100.58 cw(c-183.77,90.78) -176.84,97.71 ; -176.84,97.71 -120.17,41.04 ; -120.17,41.04 ccw(c-113.24,47.97) -113.24,38.17 ; -120.17,41.04 ccw(c-113.24,47.97) -113.24,38.17 ; -120.17,41.04 ccw(c-113.24,47.97) -113.24,38.17 ; -113.24,38.17 -101.92,38.17 ; -101.92,38.17 ccw(c-101.92,47.97) -94.99,41.04 ; -101.92,38.17 ccw(c-101.92,47.97) -94.99,41.04 ; -101.92,38.17 ccw(c-101.92,47.97) -94.99,41.04 ; -94.99,41.04 v2(-77.73,58.3) -56.23,79.8 ; -56.23,79.8 cw(c-49.3,72.87) -49.3,82.67 ; -56.23,79.8 cw(c-49.3,72.87) -49.3,82.67 ; -56.23,79.8 cw(c-49.3,72.87) -49.3,82.67 ; -56.23,79.8 cw(c-49.3,72.87) -49.3,82.67 ; -49.3,82.67 78.18,82.67 ; 78.18,82.67 ccw(c78.18,92.47) 85.11,85.54 ; 78.18,82.67 ccw(c78.18,92.47) 85.11,85.54 ; 78.18,82.67 ccw(c78.18,92.47) 85.11,85.54 ; 78.18,82.67 ccw(c78.18,92.47) 85.11,85.54 ; 85.11,85.54 104.18,104.61 ; 104.18,104.61 cw(c111.11,97.68) 111.11,107.48 ; 104.18,104.61 cw(c111.11,97.68) 111.11,107.48 ; 104.18,104.61 cw(c111.11,97.68) 111.11,107.48 ; 104.18,104.61 cw(c111.11,97.68) 111.11,107.48 ; 111.11,107.48 163.75,107.48 ; 163.75,107.48 cw(c163.75,97.68) 170.68,104.61 ; 163.75,107.48 cw(c163.75,97.68) 170.68,104.61 ; 163.75,107.48 cw(c163.75,97.68) 170.68,104.61 ; 163.75,107.48 cw(c163.75,97.68) 170.68,104.61 ; 170.68,104.61 190.46,84.83 ; 190.46,84.83 ccw(c197.39,91.76) 197.39,81.96 ; 190.46,84.83 ccw(c197.39,91.76) 197.39,81.96 ; 190.46,84.83 ccw(c197.39,91.76) 197.39,81.96 ; 190.46,84.83 ccw(c197.39,91.76) 197.39,81.96 ; 197.39,81.96 222.98,81.96 ; 222.98,81.96 cw(c222.98,72.16) 229.91,79.09 ; 222.98,81.96 cw(c222.98,72.16) 229.91,79.09 ; 222.98,81.96 cw(c222.98,72.16) 229.91,79.09 ; 222.98,81.96 cw(c222.98,72.16) 229.91,79.09 ; 229.91,79.09 366.4,-57.4 ; 366.4,-57.4 cw(c359.47,-64.33) 369.27,-64.33 ; 366.4,-57.4 cw(c359.47,-64.33) 369.27,-64.33 ; 366.4,-57.4 cw(c359.47,-64.33) 369.27,-64.33 ; 366.4,-57.4 cw(c359.47,-64.33) 369.27,-64.33 ; 369.27,-106.54 ccw(c379.07,-106.54) 372.14,-113.47 ; 369.27,-106.54 ccw(c379.07,-106.54) 372.14,-113.47 ; 369.27,-106.54 ccw(c379.07,-106.54) 372.14,-113.47 ; 369.27,-106.54 ccw(c379.07,-106.54) 372.14,-113.47 ; 369.27,-106.54 369.27,-64.33 ; 372.14,-113.47 382.2,-123.53 ; 382.2,-123.53 ccw(c389.13,-116.6) 389.13,-126.4 ; 382.2,-123.53 ccw(c389.13,-116.6) 389.13,-126.4 ; 382.2,-123.53 ccw(c389.13,-116.6) 389.13,-126.4 ; 382.2,-123.53 ccw(c389.13,-116.6) 389.13,-126.4 ; 389.13,-126.4 397.39,-126.4 ; 397.39,-126.4 ccw(c397.39,-116.6) 404.32,-123.53 ; 397.39,-126.4 ccw(c397.39,-116.6) 404.32,-123.53 ; 397.39,-126.4 ccw(c397.39,-116.6) 404.32,-123.53 ; 397.39,-126.4 ccw(c397.39,-116.6) 404.32,-123.53 ; 404.32,-123.53 v2(418.96,-108.89) 424.78,-103.07 ; 424.78,-103.07 cw(c431.71,-110) 431.71,-100.2 ; 424.78,-103.07 cw(c431.71,-110) 431.71,-100.2 ; 424.78,-103.07 cw(c431.71,-110) 431.71,-100.2 ; 424.78,-103.07 cw(c431.71,-110) 431.71,-100.2 ; 424.78,-103.07 cw(c431.71,-110) 431.71,-100.2 ; 431.71,-100.2 713.32,-100.2 ; 713.32,-100.2 ccw(c713.32,-90.4) 720.25,-97.33 ; 713.32,-100.2 ccw(c713.32,-90.4) 720.25,-97.33 ; 713.32,-100.2 ccw(c713.32,-90.4) 720.25,-97.33 ; 713.32,-100.2 ccw(c713.32,-90.4) 720.25,-97.33 ; 713.32,-100.2 ccw(c713.32,-90.4) 720.25,-97.33 ; 720.25,-97.33 788.55,-29.02 ; 788.55,-29.02 cw(c795.48,-35.95) 795.48,-26.15 ; 788.55,-29.02 cw(c795.48,-35.95) 795.48,-26.15 ; 788.55,-29.02 cw(c795.48,-35.95) 795.48,-26.15 ; 788.55,-29.02 cw(c795.48,-35.95) 795.48,-26.15 ; 788.55,-29.02 cw(c795.48,-35.95) 795.48,-26.15 ; 795.48,-26.15 867.99,-26.15 ; 867.99,-26.15 ccw(c867.99,-16.35) 874.92,-23.28 ; 867.99,-26.15 ccw(c867.99,-16.35) 874.92,-23.28 ; 867.99,-26.15 ccw(c867.99,-16.35) 874.92,-23.28 ; 867.99,-26.15 ccw(c867.99,-16.35) 874.92,-23.28 ; 867.99,-26.15 ccw(c867.99,-16.35) 874.92,-23.28 ; 874.92,-23.28 1019.26,121.06 ; 1019.26,121.06 cw(c1026.19,114.13) 1026.19,123.93 ; 1019.26,121.06 cw(c1026.19,114.13) 1026.19,123.93 ; 1019.26,121.06 cw(c1026.19,114.13) 1026.19,123.93 ; 1019.26,121.06 cw(c1026.19,114.13) 1026.19,123.93 ; 1019.26,121.06 cw(c1026.19,114.13) 1026.19,123.93 ; 1026.19,123.93 1271.66,123.93 ; 1271.66,123.93 ccw(c1271.66,133.73) 1278.59,126.8 ; 1271.66,123.93 ccw(c1271.66,133.73) 1278.59,126.8 ; 1271.66,123.93 ccw(c1271.66,133.73) 1278.59,126.8 ; 1271.66,123.93 ccw(c1271.66,133.73) 1278.59,126.8 ; 1271.66,123.93 ccw(c1271.66,133.73) 1278.59,126.8
  Bottom Layer w5.6: U9.2@-641.76,214.67 -628.03,214.67 ccw(c-628.03,224.47) -621.1,217.54 -614.2,224.45 ccw(c-621.13,231.38) -611.33,231.38 v2(-611.33,252.74) -585.52,267.82 R26.2@-585.52,272.34 ; v2(418.96,-108.89) 433.68,-123.9 ccw(c440.68,-117.04) 440.68,-126.84 625.6,-126.84 cw(c625.6,-136.64) 632.53,-129.71 671.73,-168.91 cw(c664.8,-175.84) 674.6,-175.84 674.6,-296.37 ccw(c684.4,-296.37) 677.47,-303.3 686.65,-312.48 v1(686.65,-313.08)